# Altium PCB FPGA.PcbDoc (part 3 of 4)
Units mil, origin at the board's own origin, x right, y up, seen from the top; angles counter-clockwise.
Board outline 4000 x 2400 mil, 6 copper layers (Top Layer, InternalPlane1, MidLayer1, InternalPlane2, InternalPlane3, Bottom Layer), stack 58.8 mil thick; 235 components, 235 nets, 1406 pads, 621 vias.
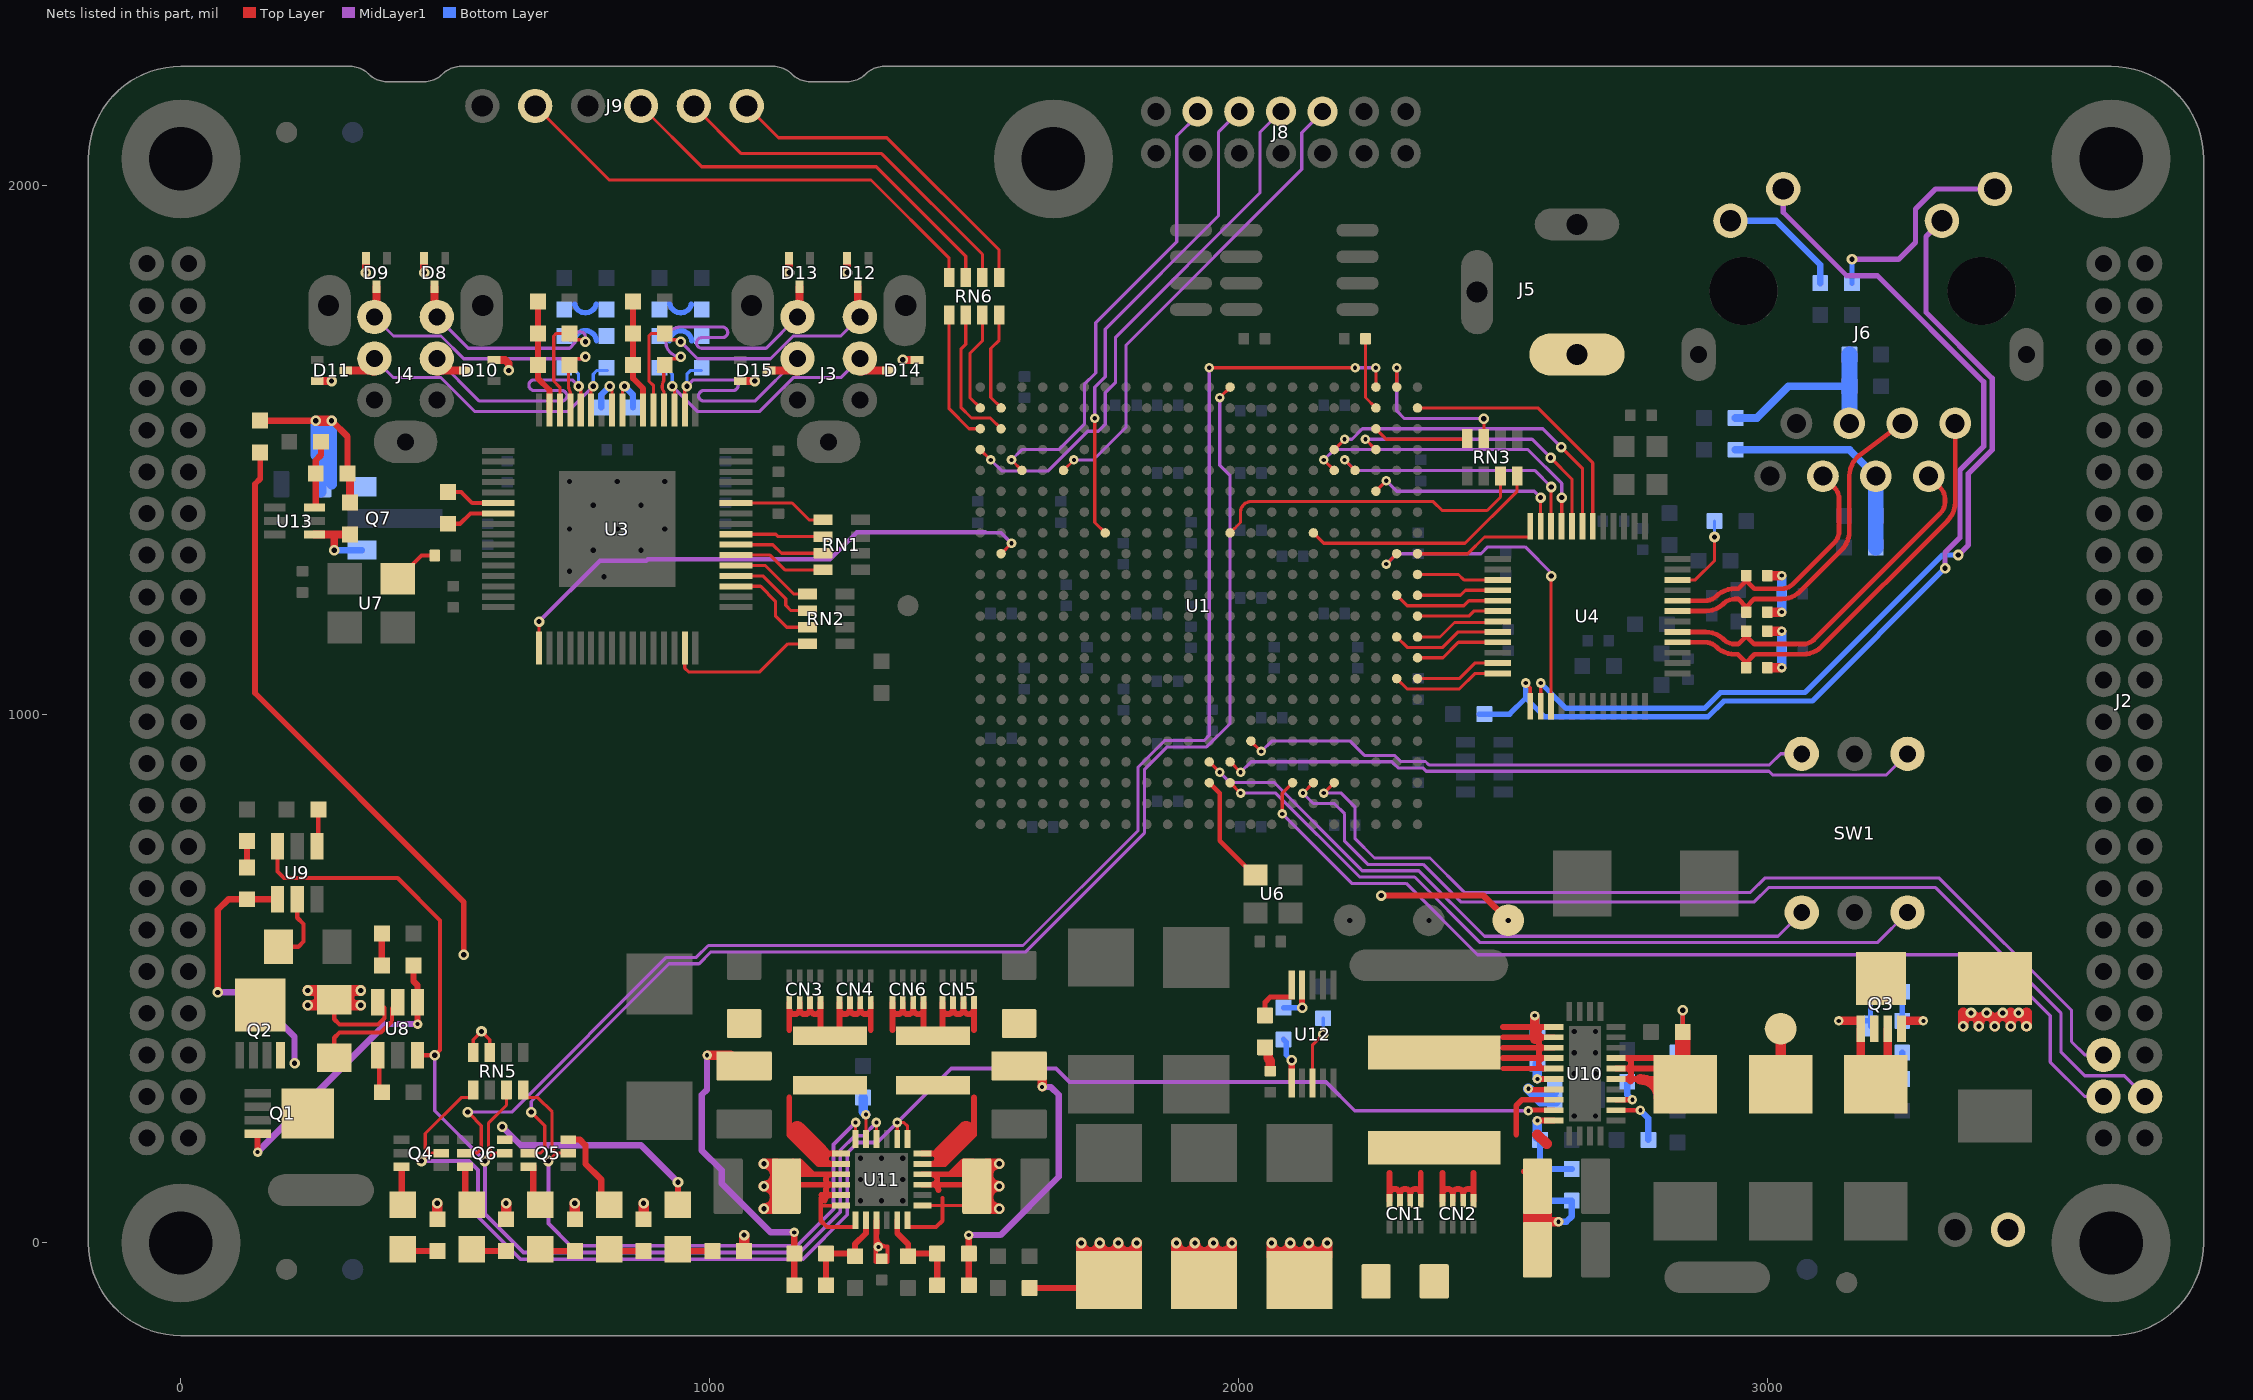
[diagram p7: the nets of this part, all layers, seen from the top]

## Via types
v1: diameter 20, hole 10, Top Layer to Bottom Layer, tented both sides, 322 vias
v2: diameter 18, hole 8, Top Layer to Bottom Layer, tented both sides, 299 vias

## Nets (pads, with @x,y where several pads share a name; then routed paths per layer and width w, separated by ;. In a path a pad name is that pad's centre, name@x,y a point inside that pad or via, vN(x,y) a via of type N, cw(c..) or ccw(c..) an arc to the next point about the centre after c; other vN are vias at no path point) (continued)
IO2-36: J2.40 U1.V3 | length 1799.5
  Top Layer w6: v2(2161.22,850.67) U1.V3@2180.91,870.35
  MidLayer1 w6: v2(2161.22,850.67) 2194.33,850.67 2220,825 2220,765 2257,728 2362,728 2427,663 2968,663 2995,690 3325,690 3575,440 3575,380.71 3600,355.71 J2.40@3635.63,355.71
IO2-37: J2.41 U1.U3 | length 1953.9
  Top Layer w6: v2(2121.85,850.67) U1.U3@2141.54,870.35
  MidLayer1 w6: v2(2121.85,850.67) 2141.54,830.98 2180.91,830.98 2200.59,811.3 2200.59,759.41 2244,716 2349,716 2420,645 2975,645 3002,672 3318,672 3555,435 3555,361.34 3600,316.34 3675,316.34 J2.41@3714.37,276.97
IO2-38: J2.42 U1.T3 | length 1893.3
  Top Layer w6: v2(2082.48,811.3) 2082.48,850.67 U1.T3@2102.17,870.35
  MidLayer1 w6: v2(2082.48,811.3) 2213.78,680 2316.87,680 2451.87,545 3420,545 3535,430 3535,341.97 3600,276.97 J2.42@3635.63,276.97
LREQ: U1.B14 U3.1 | length 1049.8
  Top Layer w6: U3.1@677.36,1125 v1(677.36,1175) ; U1.B14@1550.98,1303.43 v2(1570.67,1323.11)
  MidLayer1 w7: 1521,1344 1522.2,1342.8 1550.98,1342.8 v2(1570.67,1323.11)
  MidLayer1 w8: v1(677.36,1175) 792.36,1290 880,1290 883,1293 1227.25,1293 1278.25,1344 1521,1344
NetC1_1: C1.1 C31.1 CN5.5 CN5.6 CN5.7 CN5.8 CN6.5 CN6.6 CN6.7 CN6.8 L3.2 L6.1 R42.1 | length 993.7
  Top Layer w11: 1345.47,402.5 CN6.5@1345.47,455 ; CN6.5@1345.47,442.5 ccw(c1355.32,442.5) 1365.16,442.36 ; CN6.6@1365.16,455 1365.16,442.36 ; CN6.7@1384.84,455 CN6.7@1384.84,442.5 ; L3.2@1404.53,402.5 CN6.8@1404.53,442.5 ; CN6.8@1404.53,455 CN6.8@1404.53,442.5 ; L3.2@1440.47,402.5 CN5.5@1440.47,455 ; CN5.5@1440.47,442.5 ccw(c1450.32,442.5) 1460.16,442.36 ; CN5.6@1460.16,455 1460.16,442.36 ; CN5.7@1479.84,455 CN5.7@1479.84,442.5 ; 1499.53,402.5 CN5.8@1499.53,442.5 ; CN5.8@1499.53,455 CN5.8@1499.53,442.5 ; 1365.16,442.36 ccw(c1375,442.5) CN6.7@1384.84,442.5 ; CN6.7@1384.84,442.5 ccw(c1394.69,442.5) CN6.8@1404.53,442.5 ; 1460.16,442.36 ccw(c1470,442.5) CN5.7@1479.84,442.5 ; CN5.7@1479.84,442.5 ccw(c1489.69,442.5) CN5.8@1499.53,442.5
  Top Layer w12: C1.1@1490,-80 R42.1@1490,-20 v2(1490,15)
  Top Layer w18: v2(1628.5,295) C31.1@1628.5,340
  MidLayer1 w12: v2(1490,15) 1550,15 1660,125 1660,280 1645,295 v2(1628.5,295)
NetC1_2: C1.2 R38.1 R42.2 U11.5 | length 197.7
  Top Layer w11: U11.5@1354.53,43 1354.53,18.47 1375.5,-2.5 R38.1@1375.5,-15.5 ; R38.1@1365.5,-15.5 R38.1@1375,-25
  Top Layer w12: R38.1@1375,-25 1380,-20 R42.2@1430,-20 C1.2@1430,-80
NetC2_1: C2.1 C30.1 CN3.5 CN3.6 CN3.7 CN3.8 CN4.5 CN4.6 CN4.7 CN4.8 L2.2 L5.1 R43.1 | length 1028.4
  Top Layer w11: 1150.47,402.5 CN3.5@1150.47,455 ; CN3.5@1150.47,442.5 ccw(c1160.32,442.5) 1170.16,442.36 ; CN3.6@1170.16,455 1170.16,442.36 ; CN3.7@1189.84,455 CN3.7@1189.84,442.5 ; L2.2@1209.53,402.5 CN3.8@1209.53,442.5 ; CN3.8@1209.53,455 CN3.8@1209.53,442.5 ; L2.2@1245.47,402.5 CN4.5@1245.47,455 ; CN4.5@1245.47,442.5 ccw(c1255.32,442.5) 1265.16,442.36 ; CN4.6@1265.16,455 1265.16,442.36 ; CN4.7@1284.84,455 CN4.7@1284.84,442.5 ; 1304.53,402.5 CN4.8@1304.53,442.5 ; CN4.8@1304.53,455 CN4.8@1304.53,442.5 ; 1170.16,442.36 ccw(c1180,442.5) CN3.7@1189.84,442.5 ; CN3.7@1189.84,442.5 ccw(c1199.69,442.5) CN3.8@1209.53,442.5 ; 1265.16,442.36 ccw(c1275,442.5) CN4.7@1284.84,442.5 ; CN4.7@1284.84,442.5 ccw(c1294.69,442.5) CN4.8@1304.53,442.5
  Top Layer w12: C2.1@1160,-80 R43.1@1160,-20 v2(1160,20)
  Top Layer w18: v2(995,355) C30.1@1040,355
  MidLayer1 w12: v2(995,355) 995,290 985,280 985,175 1022.5,137.5 1022.5,112.5 1115,20 v2(1160,20)
NetC2_2: C2.2 R40.1 R43.2 U11.2 | length 184.3
  Top Layer w11: R40.1@1274.5,-15.5 1274.5,-2.5 1295.47,18.47 U11.2@1295.47,43
  Top Layer w12: C2.2@1220,-80 R43.2@1220,-20 1270,-20 R40.1@1275,-25
NetC3_1: C3.1 C26.1 C27.1 CN1.5 CN1.6 CN1.7 CN1.8 CN2.5 CN2.6 CN2.7 CN2.8 L1.2 L4.1 R41.1 U10.22 | length 915.1
  Top Layer w11: CN1.8@2285.47,80 2285.47,92.5 ; 2285.47,132.5 2285.47,92.5 ; CN1.7@2305.16,80 2305.16,92.5 ; CN1.6@2324.84,80 2324.84,92.64 ; CN1.5@2344.53,80 2344.53,132.5 ; 2344.53,92.5 ccw(c2334.68,92.5) 2324.84,92.64 ; CN2.8@2385.47,80 2385.47,92.5 ; 2385.47,132.5 2385.47,92.5 ; CN2.7@2405.16,80 2405.16,92.5 ; CN2.6@2424.84,80 2424.84,92.64 ; CN2.5@2444.53,80 2444.53,132.5 ; 2444.53,92.5 ccw(c2434.68,92.5) 2424.84,92.64 ; 2525,205 2525,260 2535.79,270.79 U10.22@2596,270.79 ; C27.1@2540,135 C27.1@2565,110 ; 2285.47,92.5 cw(c2295.31,92.5) 2305.16,92.5 ; 2305.16,92.5 cw(c2315,92.5) 2324.84,92.64 ; 2385.47,92.5 cw(c2395.31,92.5) 2405.16,92.5 ; 2405.16,92.5 cw(c2415,92.5) 2424.84,92.64
  Top Layer w18: 2565,40 v2(2605,40)
  Top Layer w20: 2565,205 2582.5,187.5
  Top Layer w55: C26.1@2565,-10 2565,40 C27.1@2565,107.5 C27.1@2565,110
  Bottom Layer w12: R41.1@2570,80 C3.1@2630,80 2630,50 2620,40 v2(2605,40)
NetC3_2: C3.2 R39.1 R41.2 U10.24 | length 184.3
  Top Layer w11: v2(2565.16,231.42) U10.24@2596,231.42
  Bottom Layer w11: R39.1@2565.16,199.84 R39.1@2570,195
  Bottom Layer w12: R39.1@2570,195 R41.2@2570,140 C3.2@2630,140
  Bottom Layer w18: R39.1@2565.16,199.84 v2(2565.16,231.42)
NetC4_1: C4.1 R5.2 R6.2 R9.1 | length 118.8
  Bottom Layer w10: 924.05,1705.46 cw(c945,1704) 965.95,1705.46 ; 924.62,1774.92 ccw(c945,1780) 965.38,1774.92
NetC5_1: C5.1 R7.2 R8.2 R10.1 | length 118.8
  Bottom Layer w10: 744.05,1705.46 cw(c765,1704) 785.95,1705.46 ; 744.62,1774.92 ccw(c765,1780) 785.38,1774.92
NetC6_1: C6.1 U12.3 | length 130.8
  Top Layer w6: U12.3@2140,302.5 2140,375 v1(2160,395)
  Bottom Layer w6: v1(2160,395) C6.1@2160,425
NetC7_1: C7.1 U10.2 | length 108.2
  Top Layer w9: U10.2@2714,251.1 v2(2759.84,251.1)
  Bottom Layer w12: v2(2759.84,251.1) 2775,235.94 C7.1@2775,195
NetC8_1: C8.1 R19.2 | length 60
  Top Layer w12: R19.2@380,525 C8.1@380,585
NetC9_1: C9.1 R20.2 | length 50
  Top Layer w12: R20.2@125,710 C9.1@125,760
NetC10_1: C10.1 U3.54 | length 103.6
  Top Layer w8: C10.1@505,1420 530,1420 550.79,1399.21 U3.54@600,1399.21
NetC10_2: C10.2 U3.55 | length 102.1
  Top Layer w8: C10.2@505,1360 528,1360 547.53,1379.53 U3.55@599,1379.53
NetC11_1: C11.1 C23.1 J6.5 L10.2 | length 369.9
  Bottom Layer w15: L10.2@2940,1560 2980,1560 3040,1620 C11.1@3155,1620
  Bottom Layer w30: J6.5@3155,1550 C11.1@3155,1620 C23.1@3155,1680
NetC12_1: C12.1 C20.1 J6.4 L9.2 | length 420.7
  Bottom Layer w15: L9.2@2940,1500 3155,1500 J6.4@3205,1450
  Bottom Layer w30: C20.1@3205,1315 C12.1@3205,1375 J6.4@3205,1450
NetC14_1: C14.1 R3.1 R4.1 U3.38 | length 213
  Top Layer w11.5: C14.1@855,1780 R3.1@855,1720 R4.1@855,1660 855,1635 874.21,1615.79 U3.38@874.21,1575
NetC15_1: C15.1 R1.1 R2.1 U3.47 | length 214.1
  Top Layer w11.5: C15.1@675,1780 R1.1@675,1720 R2.1@675,1660 675,1635 697.05,1612.95 U3.47@697.05,1575
NetC16_1: C16.1 U10.20 | length 60
  Top Layer w11: v2(2565.16,310.16) U10.20@2596,310.16
  Bottom Layer w18: C16.1@2565,339.21 2565.16,339.06 v2(2565.16,310.16)
NetC16_2: C16.2 L1.1 U10.15 U10.16 U10.17 U10.18 U10.19 | length 681.5
  Top Layer w9: 2577.46,329.84 U10.19@2596,329.84
  Top Layer w9.3: 2500,329.84 2577.46,329.84
  Top Layer w11: 2500,349.53 2577.5,349.53 ; 2500,369.21 2577.5,369.21 ; 2500,388.9 2560,388.9 2577.5,388.9 ; 2500,408.58 2560,408.58 2577.5,408.58 ; 2577.46,329.84 cw(c2577.5,339.68) 2577.5,349.53 ; U10.18@2596,349.53 2577.5,349.53 ; U10.17@2596,369.21 2577.5,369.21 ; U10.16@2596,388.9 2577.5,388.9 ; U10.15@2596,408.58 2577.5,408.58 ; 2577.5,349.53 cw(c2577.5,359.37) 2577.5,369.21 ; 2577.5,369.21 cw(c2577.5,379.06) 2577.5,388.9 ; 2577.5,388.9 cw(c2577.5,398.74) 2577.5,408.58
  Top Layer w18: 2560,385 2560,388.9 2560,408.58 v2(2560,430)
  Bottom Layer w18: v2(2560,430) 2560,404.21 C16.2@2565,399.21
NetC17_1: C17.1 U8.1 | length 71
  Top Layer w8: U8.1@372.5,355 375,352.5 C17.1@375,285
NetC18_1: C18.1 U9.1 | length 71
  Top Layer w8: U9.1@257.5,750 260,752.5 C18.1@260,820
NetC24_1: C24.1 U10.21 | length 193.6
  Top Layer w7: v2@2550.16,288.47 U10.21@2596,288.47 ; v2@2550.16,291.47 U10.21@2596,291.47
  Bottom Layer w20: v2(2548.16,291.47) 2571.63,268 C24.1@2600,268 ; 2555.63,285 C24.1@2596,285
NetC161_1: C161.1 R50.1 R51.2 | length 123
  Top Layer w18: R51.2@3000,1088 v2(3027,1088) ; R50.1@3000,1157 v2(3027,1157)
  Bottom Layer w18: v2(3027,1088) C161.1@3027,1122.5 v2(3027,1157)
NetC162_1: C162.1 R48.1 R49.2 | length 123
  Top Layer w18: R49.2@3000,1193 v2(3027,1193) ; R48.1@3000,1262 v2(3027,1262)
  Bottom Layer w18: v2(3027,1193) C162.1@3027,1227.5 v2(3027,1262)
NetD2_2: D2.2 R11.1 R12.2 | length 110
  Bottom Layer w12: D2.2@3195,310 R11.1@3255,310 R12.2@3255,360
NetD3_1: D3.1 Q4.6 | length 77
  Top Layer w12: Q4.6@417.5,144.41 417.5,74.5 D3.1@420,72 D3.1@422.5,74.5
NetD3_2: D3.2 R14.1 | length 66.2
  Top Layer w12: D3.2@420,-12 423,-15 R14.1@485,-15
NetD4_1: D4.1 Q6.6 | length 69.9
  Top Layer w12: D4.1@537.5,74.5 Q6.6@537.5,144.41
NetD4_2: D4.2 R15.1 | length 66.2
  Top Layer w12: D4.2@550,-12 553,-15 R15.1@615,-15
NetD5_1: D5.1 Q5.3 | length 168.5
  Top Layer w12: Q5.3@732.5,195.59 754.41,195.59 765,185 765,150 795,120 795,87 D5.1@810,72
NetD5_2: D5.2 R16.1 | length 66.2
  Top Layer w12: D5.2@810,-12 813,-15 R16.1@875,-15
NetD6_1: D6.1 Q6.3 | length 419
  Top Layer w12: D6.1@940,72 v1(940,115)
  MidLayer1 w12: v1(607.5,220) 642.5,185 870,185 v1(940,115)
NetD6_2: D6.2 R17.1 | length 66.2
  Top Layer w12: D6.2@940,-12 943,-15 R17.1@1005,-15
NetD7_1: D7.1 Q5.6 | length 84.1
  Top Layer w12: D7.1@666.5,75 Q5.6@666.5,144.91 ; D7.1@680,72 D7.1@690,82
NetD7_2: D7.2 R18.1 | length 66.2
  Top Layer w12: D7.2@680,-12 683,-15 R18.1@745,-15
NetJ6_1: J6.1 R51.1 U4.16 | length 830.4
  Top Layer w9: U4.16@2830,1135.79 2882.57,1135.79 cw(c2882.57,1105.79) 2903.77,1127.01 ; 2903.21,1127.54 ccw(c2938.1,1162.47) 2938.1,1113.1 2944.37,1113.1 R51.1@2960,1097.47 ; R51.1@2960,1088 R51.1@2960,1097.47 ; J6.1@3355,1550 3355,1400.74 cw(c3305.63,1400.74) 3340.58,1365.87 3102.25,1127.54 cw(c3067.36,1162.47) 3067.36,1113.1 2975.63,1113.1 R51.1@2960,1097.47
NetJ6_2: J6.2 R50.2 U4.17 | length 700.8
  Top Layer w9: U4.17@2830,1155.47 2882.89,1155.47 cw(c2882.57,1105.79) 2915.3,1143.18 2917.23,1141.25 ccw(c2938.43,1162.47) 2938.43,1132.47 2944.94,1132.47 2960,1147.53 2975.06,1132.47 3067.36,1132.47 ccw(c3067.36,1162.47) 3088.56,1141.25 3326.85,1379.54 ccw(c3305.63,1400.74) 3335.63,1400.74 3335.63,1406.94 ccw(c3305.63,1406.94) 3326.85,1428.15 J6.2@3305,1450
NetJ6_3: J6.3 R49.1 U4.19 | length 666.1
  Top Layer w9: U4.19@2830,1194.84 2882.89,1194.84 ; 2882.57,1194.84 ccw(c2882.57,1244.53) 2882.89,1194.84 ; 2917.69,1209.37 cw(c2882.57,1244.53) 2915.3,1207.14 ; J6.3@3247.72,1550 J6.3@3255,1550 3174.91,1489.93 ccw(c3205,1450) 3155,1450 3155,1345.74 cw(c3105.63,1345.74) 3140.58,1310.87 3061.99,1232.28 cw(c3027.1,1267.21) 3027.1,1217.84 2975.37,1217.84 2960,1202.47 2944.63,1217.84 2938.43,1217.84 ccw(c2938.43,1187.84) 2917.23,1209.07 2915.3,1207.14 ; 2882.89,1194.84 ccw(c2882.57,1244.53) 2915.3,1207.14
NetJ6_6: J6.6 R48.2 U4.20 | length 490.5
  Top Layer w9: U4.20@2830,1214.53 2882.57,1214.53 ccw(c2882.57,1244.53) 2903.77,1223.3 ; 2903.21,1222.77 cw(c2938.1,1187.84) 2938.1,1237.21 2944.69,1237.21 2960,1252.53 2975.32,1237.21 3027.1,1237.21 ccw(c3027.1,1267.21) 3048.3,1245.99 3126.85,1324.54 ccw(c3105.63,1345.74) 3135.63,1345.74 3135.63,1406.94 ccw(c3105.63,1406.94) 3126.85,1428.15 J6.6@3105,1450
NetJ6_9: J6.9 R22.2 | length 407
  MidLayer1 w10: v1(3160,1860) 3248,1860 3280,1892 3280,1955 3318,1993 J6.9@3430,1993
  Bottom Layer w10: R22.2@3160,1815 v1(3160,1860)
NetJ6_10: J6.10 U4.2 | length 1696.2
  Top Layer w6: U4.2@2571.42,1015 v2(2571.42,1058.9)
  MidLayer1 w10: J6.10@3330,1933 3300,1903 3300,1760 3425,1635 3425,1499.8 3380,1454.8 3380,1320 v1(3361,1301)
  Bottom Layer w10: v2(2571.42,1058.9) 2619.32,1011 2881,1011 2911,1041 3071,1041 3331,1301 v1(3361,1301)
NetJ6_11: J6.11 R45.2 U4.1 | length 2039.1
  Top Layer w6: v2(2543,1058.9) 2551.73,1050.17 U4.1@2551.73,1015
  MidLayer1 w10: J6.11@3030,1993 3030,1949 3149.98,1829.02 3208.36,1829.02 3409,1628.37 3409,1506.43 3364,1461.43 3364,1333.7 3336,1305.7 v1(3336,1276)
  Bottom Layer w10: R45.2@2455,1000 R45.2@2465,1000 2512.55,1000 2543,1030.45 ; v2(2543,1058.9) 2543,1030.45 ; v1(3336,1276) 3085,1025 2917.63,1025 2887.63,995 2578.45,995 2543,1030.45
NetJ6_12: J6.12 R21.2 | length 239.4
  Bottom Layer w12: J6.12@2930,1933 3017,1933 3100,1850 R21.2@3100,1815
NetJ9_2: J9.2 RN6.4 | length 938.7
  Top Layer w6: J9.2@670,2150 810,2010 1305,2010 1452.76,1862.24 RN6.4@1452.76,1825.5
NetJ9_4: J9.4 RN6.3 | length 790.4
  Top Layer w6: J9.4@859.37,2165 J9.4@872.19,2152.19 ; J9.4@870,2150 985,2035 1315,2035 1484.25,1865.75 RN6.3@1484.25,1825.5
NetJ9_5: J9.5 RN6.2 | length 705.8
  Top Layer w6: J9.5@970,2150 1060,2060 1325,2060 1515.75,1869.25 RN6.2@1515.75,1825.5
NetJ9_6: J9.6 RN6.1 | length 642.3
  Top Layer w6: J9.6@1070,2150 1130,2090 1335,2090 1547.24,1877.76 RN6.1@1547.24,1825.5
NetL2_1: L2.1 U11.19 U11.20 | length 329.3
  Top Layer w11: 1150.5,275 1150.5,204.53 1205.5,149.53 ; 1205.5,175 1205.5,174.53 1205.5,149.53 ; U11.20@1248,149.53 1229.5,149.53 ; U11.19@1248,169.21 1229.5,169.21 ccw(c1229.5,159.37) 1229.5,149.53 ; 1205.5,149.53 1229.5,149.53
  Top Layer w32: 1165.5,214.53 1205.5,174.53 1210.5,169.53
NetL3_1: L3.1 U11.11 U11.12 | length 303.8
  Top Layer w11: U11.11@1402,149.53 1420.5,149.53 ; U11.12@1402,169.21 1420.5,169.21 cw(c1420.5,159.37) 1420.5,149.53 ; 1499.5,275 1499.5,204.53 1444.5,149.53 1420.5,149.53
  Top Layer w32: 1439.5,169.53 1484.5,214.53
NetQ1_4: Q1.4 R19.1 U8.4 | length 556.5
  Top Layer w12: v2(145,171.99) Q1.4@145,206.61 ; R19.1@440,525 440,495 447.5,487.5 U8.4@447.5,455 v2(447.5,414) v2@447.5,411.47
  MidLayer1 w12: v2(145,171.99) 387.01,414 v2(447.5,414) v2@447.5,411.47
NetQ1_5: Q1.5 R53.2 U8.5 | length 183.3
  Top Layer w8: R53.2@290,353 290,388 300,398 378,398 399,419 399,444 U8.5@400,445
NetQ2_4: Q2.4 R20.1 U9.4 | length 511.7
  Top Layer w12: v1(70,473.82) 70,630 90,650 R20.1@125,650 U9.4@182.5,650 U9.4@187.5,650
  MidLayer1 w12: v1(70,473.82) 131.18,473.82 215,390 v1(215,340)
NetQ2_5: Q2.5 R52.2 U9.5 | length 136.1
  Top Layer w8: R52.2@185,560 222,560 232,570 232,603 220,615 U9.5@220,650
NetQ3_4: Q3.4 R12.1 R35.2 | length 136.6
  Top Layer w16: Q3.4@3253.39,420 v2(3295,420)
  Bottom Layer w10: R12.1@3255,420 R35.2@3255,475
  Bottom Layer w12: R12.1@3255,420 v2(3295,420)
NetQ5_5: Q5.5 U1.N22 | length 2474.1
  Top Layer w6: Q5.5@657.5,170 680,170 688,178 688,222 v1(662.5,247.5) ; v2(1964.37,1598.7) U1.N22@1984.06,1618.39
  MidLayer1 w6: v1(662.5,247.5) 662.5,267.5 923,528 979.9,528 1002.4,550.5 1597.47,550.5 1822,775.03 1822,895.03 1864.97,938 1939.66,938 1984.06,982.4 1984.06,1450.94 1964.37,1470.63 v2(1964.37,1598.7)
NetQ6_5: Q6.5 U1.Y22 | length 2922.8
  Top Layer w6: Q6.5@537.5,170 560,170 568,178 568,222 v1@545.99,244.01 ; v2(1944.69,1655) v2(2220.28,1655) ; U1.Y22@2259.65,1618.39 v2@2259.65,1654.65
  MidLayer1 w6: v1(542.5,247.5) 625.53,247.5 918.03,540 974.93,540 997.43,562.5 1592.5,562.5 1810,780 1810,900 1860,950 1934.68,950 1944.68,960 v2(1944.69,1655) ; v2(2220.28,1655) v2(2259.65,1655)
NetQ7_1: Q7.1 R23.2 U13.1 | length 138.8
  Top Layer w15: U13.1@252.5,1339.41 290,1339.41 ; v1(290,1310) 290,1339.41 ; R23.2@309.41,1339.41 290,1339.41
  Bottom Layer w12: v1(290,1310) Q7.1@342.5,1310
NetR13_1: R13.1 U3.40 | length 89.5
  Top Layer w6: U3.40@834.84,1578.9 834.84,1616 v1(838.84,1620)
  Bottom Layer w12: v1(838.84,1620) 855,1603.84 R13.1@855,1580
NetR13_2: R13.2 U3.41 | length 93.3
  Top Layer w6: v1(811.16,1620) 815.16,1616 U3.41@815.16,1575
  Bottom Layer w12: R13.2@795,1580 795,1603.84 v1(811.16,1620)
NetR25_1: R25.1 R26.2 U13.3 | length 126.1
  Top Layer w12: U13.3@255,1393.09 R26.2@255,1455 255,1480 265,1490 R25.1@265,1515
NetR27_1: R27.1 U10.3 | length 70.3
  Top Layer w11: U10.3@2714,270.79 v2(2744.84,270.79)
  Bottom Layer w11: v2(2744.84,270.79) v2@2745.66,271.6
  Bottom Layer w12: R27.1@2735,305 2735,280.63 v2(2744.84,270.79)
NetR29_1: R29.1 U4.22 | length 160
  Top Layer w6: U4.22@2830,1253.9 2863.9,1253.9 2900,1290 v1(2900,1335)
  Bottom Layer w6: v1(2900,1335) R29.1@2900,1365
NetR32_1: R32.1 U11.17 | length 80.3
  Top Layer w6: U11.17@1295.47,197 v2(1295.47,242.84)
  Bottom Layer w18: R32.1@1290,275 1290,248.32 v2(1295.47,242.84)
NetR36_1: R36.1 U12.9 | length 78.3
  Top Layer w11.5: v1(2120.31,444.69) U12.9@2120.31,487.5
  Bottom Layer w10: R36.1@2085,445 2120,445 v1(2120.31,444.69)
NetR37_1: R37.1 U12.10 | length 79.1
  Top Layer w10: R37.1@2050,430 2050,455 2060,465 U12.10@2100,465
NetR46_1: R46.1 U7.3 | length 81.6
  Top Layer w8: U7.3@405,1256 U7.3@410,1261 ; U7.3@420,1265 455,1300 R46.1@480,1300
NetR47_2: R47.2 U1.Y21 | length 139.2
  Top Layer w6: R47.2@2240,1710 R47.2@2240,1710 2239.96,1598.7 U1.Y21@2259.65,1579.02
NetRN1_5: RN1.5 U3.27 | length 177.7
  Top Layer w6: U3.27@1050,1399.21 1155.79,1399.21 1187.76,1367.24 RN1.5@1214.5,1367.24
NetRN1_6: RN1.6 U3.24 | length 166.3
  Top Layer w6: U3.24@1050,1340.16 1124.84,1340.16 1129.25,1335.75 RN1.6@1214.5,1335.75
NetRN1_7: RN1.7 U3.23 | length 171.2
  Top Layer w6: U3.23@1050,1320.47 1119.53,1320.47 1135.75,1304.25 RN1.7@1214.5,1304.25
NetRN2_7: RN2.7 U3.19 | length 183
  Top Layer w6: U3.19@1050,1241.73 1096.27,1241.73 1124.21,1213.79 1124.21,1185.79 1145.75,1164.25 RN2.7@1184.5,1164.25
NetRN2_8: RN2.8 U3.15 | length 294.3
  Top Layer w6: U3.15@952.95,1125 952.95,1087.05 960,1080 1095,1080 1147.76,1132.76 RN2.8@1184.5,1132.76
NetRN3_3: RN3.3 U1.N15 | length 638.7
  Top Layer w6: U1.N15@1984.06,1342.8 2003.74,1362.48 2003.74,1382.17 ; RN3.3@2495.34,1450.26 2495.34,1410.34 2470,1385 2385,1385 2368.15,1401.85 2023.43,1401.85 ; 2003.74,1382.17 cw(c2023.43,1382.17) 2023.43,1401.85 ; 2003.74,1382.17 cw(c2023.43,1382.17) 2023.43,1401.85
NetRN3_4: RN3.4 U1.U15 | length 462.8
  Top Layer w6: U1.U15@2141.54,1342.8 2161.22,1323.11 2428.11,1323.11 2526.83,1421.83 RN3.4@2526.83,1450.26
NetRN3_7: RN3.7 U1.AA22 | length 326.2
  Top Layer w6: U1.AA22@2299.02,1618.39 v2@2299.02,1654.65 ; RN3.7@2463.84,1521.26 v1(2463.84,1558.76)
  MidLayer1 w6: v2(2299.02,1655) 2299.02,1573.48 2313.74,1558.76 v1(2463.84,1558.76)
NetRN3_8: RN3.8 U1.Y20 | length 181.4
  Top Layer w6: U1.Y20@2259.65,1539.65 2279.33,1519.96 2431.04,1519.96 RN3.8@2432.35,1521.26
NetU1_M3: U1.M3 U6.3 | length 212.3
  Top Layer w9: U1.M3@1944.68,870.35 1964.37,850.67 1964.37,760.63 2029,696 U6.3@2032,696
PC0: RN2.6 U3.20 | length 169
  Top Layer w6: U3.20@1050,1261.42 1100.58,1261.42 1143.9,1218.1 1143.9,1205.59 1153.74,1195.75 RN2.6@1184.5,1195.75
PC1: RN2.5 U3.21 | length 156.8
  Top Layer w6: U3.21@1050,1281.1 1105.12,1281.1 1158.98,1227.24 RN2.5@1184.5,1227.24
PC2: RN1.8 U3.22 | length 176.1
  Top Layer w6: U3.22@1050,1300.79 1114.21,1300.79 1142.24,1272.76 RN1.8@1214.5,1272.76
PGOOD1: Q5.2 RN5.4 U11.18 | length 1120.4
  Top Layer w6: RN5.4@647.24,289.5 647.24,275 675,275 702,248 702,178 710,170 ; v1(695,155) 710,170 ; Q5.2@732.5,170 710,170 ; U11.18@1275.79,197 v2(1275.79,227.84)
  MidLayer1 w7: v1(695,155) 695,37 737,-5 1165,-5 1234,64 1234,186.06 v2(1275.79,227.84)
PGOOD3: Q6.2 RN5.3 U8.3 U9.3 U11.16 | length 2181.6
  Top Layer w6: v1(575,155) 590,170 ; RN5.3@612,285.75 RN5.3@615.75,289.5 615.75,260.75 582,227 582,178 590,170 ; Q6.2@612.5,170 590,170 ; U11.16@1315.16,197 v2(1315.16,227.84)
  Top Layer w8: U9.3@182.5,750 182.5,702.5 195,690 410,690 490,610 490,365 v1(480,355) U8.3@447.5,355
  MidLayer1 w7: v1(480,355) 480,250 v1(575,155) 575,55 648,-18 1170.38,-18 1247,58.62 1247,175.38 1274.62,203 1290.32,203 v2(1315.16,227.84)
PGOOD5: Q4.2 RN5.1 U10.23 U11.13 U11.14 | length 2844.9
  Top Layer w6: v1(455,155) 470,170 ; Q4.2@492.5,170 470,170 ; RN5.1@552.76,275 530,275 462,207 462,178 470,170 ; U11.14@1354.53,197 v2(1354.53,227.84) 1367.16,227.84 1374.21,220.79 U11.13@1374.21,197
  Top Layer w7: v2@2550.16,250.1 U10.23@2596,250.1 ; v2@2550.16,253.1 U10.23@2596,253.1
  MidLayer1 w7: v1(455,155) 545,155 562,138 562,49.62 642.62,-31 1175.77,-31 1260,53.23 1260,170 1280,190 1316.69,190 v2(1354.53,227.84) 1456.69,330 1655,330 1680.5,304.5 2165.5,304.5 2219.9,250.1 v2(2548.16,250.1)
PME: U1.AA14 U4.3 | length 625.5
  Top Layer w6: v2(2279.33,1283.74) U1.AA14@2299.02,1303.43 ; U4.3@2591.1,1015 v1(2591.1,1261.1)
  MidLayer1 w6: v2(2279.33,1283.74) 2299.02,1303.43 2458.43,1303.43 2471.27,1316.27 2541.77,1316.27 2591.1,1266.93 v1(2591.1,1261.1)
PWR: D1.1 J5.1 J7.1 Q3.5 | length 273.5
  Top Layer w20: v1(3370,410) v1@3370,415 ; 3370,435 v1@3370,415 ; v1(3400,410) v1@3400,415 ; v1(3430,410) v1@3430,415 ; v1(3460,410) v1@3460,415 ; 3460,435 3460,430 v1@3460,415 ; v1(3490,410) v1@3490,415 ; 3490,435 3490,430 v1@3490,415 ; v1@3370,415 cw(c3385,415) v1@3400,415 ; v1@3400,415 cw(c3415,415) v1@3430,415 ; v1@3430,415 cw(c3445,415) v1@3460,415 ; v1@3460,415 cw(c3475,415) v1@3490,415
  other v1: 3385,435 3415,435 3445,435 3475,435
SD0: U1.AA8 U4.48 | length 211.2
  Top Layer w6: U1.AA8@2299.02,1067.2 2318.7,1047.52 2417.52,1047.52 2446.73,1076.73 U4.48@2490,1076.73
SD1: U1.AB8 U4.47 | length 163.7
  Top Layer w6: U1.AB8@2338.39,1067.2 2417.2,1067.2 2446.42,1096.42 U4.47@2490,1096.42
SD2: U1.AB9 U4.45 | length 163.7
  Top Layer w6: U1.AB9@2338.39,1106.57 2386.57,1106.57 2415.79,1135.79 U4.45@2490,1135.79
SD3: U1.AA10 U4.44 | length 211.2
  Top Layer w6: U1.AA10@2299.02,1145.94 2318.7,1126.26 2386.26,1126.26 2415.47,1155.47 U4.44@2490,1155.47
SD4: U1.AB10 U4.43 | length 164.8
  Top Layer w6: U1.AB10@2338.39,1145.94 2380.94,1145.94 2408.32,1173.32 2490,1173.32 U4.43@2490,1175.16
SD5: U1.AB11 U4.42 | length 155.6
  Top Layer w6: U1.AB11@2338.39,1185.32 2435.32,1185.32 2444.84,1194.84 U4.42@2490,1194.84
SD6: U1.AA12 U4.41 | length 203.1
  Top Layer w6: U1.AA12@2299.02,1224.69 2318.7,1205 2425.94,1205 2435.47,1214.53 U4.41@2490,1214.53
SD7: U1.AB12 U4.40 | length 155.6
  Top Layer w6: U1.AB12@2338.39,1224.69 2419.69,1224.69 2429.21,1234.21 U4.40@2490,1234.21
SD8: U1.AB13 U4.39 | length 155.8
  Top Layer w6: U1.AB13@2338.39,1264.06 2415.94,1264.06 2426.1,1253.9 U4.39@2490,1253.9
SD9: U1.AB14 U4.36 | length 246.4
  Top Layer w6: U1.AB14@2338.39,1303.43 2433.43,1303.43 2465,1335 2551.73,1335 U4.36@2551.73,1355
SD10: U1.Y17 U4.35 | length 387.4
  Top Layer w6: U1.Y17@2259.65,1421.54 v2(2279.33,1441.22) ; v1(2571.1,1409.53) 2571.1,1355.32 U4.35@2571.42,1355
  MidLayer1 w6: v2(2279.33,1441.22) 2299.02,1421.54 2559.09,1421.54 v1(2571.1,1409.53)
SD11: U1.W18 U4.34 | length 514
  Top Layer w6: v2(2200.59,1480.59) U1.W18@2220.28,1460.91 ; U4.34@2591.1,1355 v1(2591.1,1429.53)
  MidLayer1 w6: v2(2200.59,1480.59) 2220.28,1460.91 2559.72,1460.91 v1(2591.1,1429.53)
SD12: U1.V18 U4.33 | length 595
  Top Layer w6: v2(2161.22,1480.59) U1.V18@2180.91,1460.91 ; U4.33@2610,1355.79 U4.33@2610.79,1355 2611.1,1355.32 v1(2611.1,1409.53)
  MidLayer1 w6: v2(2161.22,1480.59) 2180.91,1500.28 2547.22,1500.28 2611.1,1436.4 v1(2611.1,1409.53)
SD13: U1.Y19 U4.32 | length 539.8
  Top Layer w6: v2(2239.96,1519.96) U1.Y19@2259.65,1500.28 ; v1(2590,1485) 2630.47,1444.53 U4.32@2630.47,1355 U4.32@2630,1355.47
  MidLayer1 w6: v2(2239.96,1519.96) 2555.04,1519.96 v1(2590,1485)
SD14: U1.V19 U4.31 | length 626.4
  Top Layer w6: U1.V19@2180.91,1500.28 v2(2200.59,1519.96) ; v1(2610,1505) 2650.16,1464.84 U4.31@2650.16,1355
  MidLayer1 w6: v2(2200.59,1519.96) 2214.5,1519.96 2234.19,1539.65 2575.35,1539.65 v1(2610,1505)
SD15: U1.AB21 U4.30 | length 494.9
  Top Layer w6: U1.AB21@2338.39,1579.02 2565.98,1579.02 2669.84,1475.16 U4.30@2669.84,1355 U4.30@2670,1355.16
SEL1: SW1.1 U1.M4 | length 1275.5
  Top Layer w6: U1.M4@1944.68,909.72 v2(1964.37,890.04)
  MidLayer1 w6: v2(1964.37,890.04) 1983.37,871.04 2066.97,871.04 2234.01,704 2341,704 2465,580 3020,580 SW1.1@3065,625
SEL2: SW1.4 U1.N4 | length 1324.3
  Top Layer w6: U1.N4@1984.06,909.72 v2(2003.74,890.04)
  MidLayer1 w6: v2(2003.74,890.04) 2023.7,910 2290,910 2301.59,898.41 2348.56,898.41 2354.97,892 3003,892 3010,885 3225,885 SW1.4@3265,925
SEL4: SW1.3 U1.N3 | length 1429.8
  Top Layer w6: U1.N3@1984.06,870.35 v2(2003.74,850.67)
  MidLayer1 w6: v2(2003.74,850.67) 2070.37,850.67 2229.04,692 2333,692 2457,568 3208,568 SW1.3@3265,625
SEL8: SW1.6 U1.P5 | length 1085.3
  Top Layer w6: U1.P5@2023.43,949.09 v2(2043.11,929.41)
  MidLayer1 w6: v2(2043.11,929.41) 2062.8,949.09 2210.91,949.09 2238,922 2294.97,922 2306.56,910.41 2353.53,910.41 2359.94,904 3004,904 3025,925 SW1.6@3065,925
SOFT-TCK/RXD: RN6.6 U1.B20 | length 271
  Top Layer w6: RN6.6@1484.25,1754.5 1484.25,1699.25 1475,1690 1475,1580 1495,1560 1530.63,1560 U1.B20@1550.98,1539.65
SOFT-TDI/CTS: RN6.8 U1.B21 | length 190.2
  Top Layer w6: RN6.8@1547.24,1754.5 1547.24,1707.24 1531.3,1691.3 1531.3,1598.7 U1.B21@1550.98,1579.02
SOFT-TDO/TXD: RN6.7 U1.A21 | length 193.5
  Top Layer w6: U1.A21@1511.61,1579.02 1491.93,1598.7 1491.93,1681.93 1515.75,1705.75 RN6.7@1515.75,1754.5
SOFT-TMS/RTS: RN6.5 U1.A20 | length 251.7
  Top Layer w6: RN6.5@1452.76,1754.5 1452.76,1577.24 1490.35,1539.65 U1.A20@1511.61,1539.65
TCK: J8.6 U1.G15 | length 917.9
  Top Layer w6: v2(1728.15,1559.33) 1728.15,1362.48 U1.G15@1747.83,1342.8
  MidLayer1 w6: v2(1728.15,1559.33) 1728.15,1618.15 1747.83,1637.83 1747.83,1727.83 1961.89,1941.89 1961.89,2100 J8.6@2001.26,2139.37
TDI: J8.10 U1.E18 | length 902.8
  Top Layer w6: U1.E18@1669.09,1460.91 v2(1688.78,1480.59)
  MidLayer1 w6: v2(1688.78,1480.59) 1725.59,1480.59 1787.2,1542.2 1787.2,1697.83 2119.37,2030 2119.37,2099.37 2158.74,2138.74 J8.10@2158.74,2139.37
TDO: J8.8 U1.A19 | length 1018.8
  Top Layer w6: U1.A19@1511.61,1500.28 v2(1531.3,1480.59)
  MidLayer1 w6: v2(1531.3,1480.59) 1551.89,1460 1640,1460 1715,1535 1735,1535 1747.83,1547.83 1747.83,1607.83 1767.52,1627.52 1767.52,1712.52 2040.63,1985.63 2040.63,2100.63 2079.37,2139.37 J8.8@2080,2139.37
TMS: J8.4 U1.C18 | length 873.3
  Top Layer w6: v2(1570.67,1480.59) U1.C18@1590.35,1460.91
  MidLayer1 w6: v2(1570.67,1480.59) 1590.35,1500.28 1660.28,1500.28 1708.46,1548.46 1708.46,1623.46 1730,1645 1730,1740 1883.15,1893.15 1883.15,2093.15 1922.52,2132.52 J8.4@1922.52,2139.37
TPA0N: D13.3 J3.5 R4.2 U3.36 | length 649.8
  Top Layer w6: R4.2@913,1658.1 R4.2@913,1658 ; U3.36@913.58,1575 913.58,1609.28 cw(c929.27,1620) 913,1629.82 R4.2@913,1658 ; R4.2@915,1660 R4.2@913,1658 ; R4.2@915,1672 v1@945,1672
  Top Layer w15: J3.5@1165.94,1751.22 1170,1755.28 D13.3@1170,1808
  MidLayer1 w6: v1(945,1676) cw(c945,1704) 945,1732 1024,1732 cw(c1024,1722) 1024,1712 985,1712 ccw(c985,1702) 985,1692 1106.72,1692 J3.5@1165.94,1751.22
TPA0P: D12.3 J3.6 R3.2 U3.37 | length 649.3
  Top Layer w6: U3.37@893.9,1575 893.9,1621.1 885,1630 885,1715 890,1720 R3.2@915,1720 ; R3.2@915,1708 v1@945,1708
  Top Layer w15: D12.3@1280,1808 1280,1755.28 J3.6@1284.05,1751.22
  MidLayer1 w6: v1(945,1704) 977,1672 1115,1672 1158,1715 1247.83,1715 J3.6@1284.05,1751.22
TPA1N: D9.3 J4.5 R2.2 U3.45 | length 605.8
  Top Layer w6: R2.2@733.1,1658.1 733.1,1620 ccw(c752.1,1620) 736.42,1609.28 U3.45@736.42,1575 ; R2.2@735,1672 v1@765,1672
  Top Layer w15: J4.5@365.94,1751.22 370,1755.28 D9.3@370,1808
  MidLayer1 w6: J4.5@365.94,1751.22 402.17,1715 492,1715 535,1672 761,1672 v1(765,1676)
TPA1P: D8.3 J4.6 R1.2 U3.46 | length 606.4
  Top Layer w6: U3.46@716.73,1575 716.73,1618.27 705,1630 705,1715 710,1720 R1.2@735,1720 ; R1.2@735,1708 v1@765,1708
  Top Layer w15: D8.3@480,1808 480,1755.28 J4.6@484.05,1751.22
  MidLayer1 w6: J4.6@484.05,1751.22 543.28,1692 735,1692 745,1702 745,1713 cw(c755,1713) 765,1713 v1(765,1704)
TPB0N: D15.3 J3.3 R5.1 U3.34 | length 609.1
  Top Layer w6: U3.34@952.95,1578.9 952.95,1616 v1(956.95,1620)
  Top Layer w10: J3.3@1150.11,1650 ccw(c1165.94,1672.48) J3.3@1165.94,1644.98
  Top Layer w15: D15.3@1112,1650 1150.11,1650 1165.94,1650 J3.3@1165.94,1672.48
  MidLayer1 w6: v1(956.95,1620) 968.95,1632 1044,1632 cw(c1044,1622) 1044,1612 989,1612 ccw(c989,1602) 989,1592 1085.46,1592 J3.3@1165.94,1672.48
  Bottom Layer w6: v1(956.95,1620) 956.95,1642.9 964.05,1650 R5.1@984.05,1650
TPB0P: D14.3 J3.4 R6.1 U3.35 | length 609.2
  Top Layer w6: v1(929.27,1620) 933.27,1616 U3.35@933.27,1575
  Top Layer w10: J3.4@1284.06,1644.98 ccw(c1284.06,1672.48) J3.4@1299.89,1650
  Top Layer w15: J3.4@1284.05,1672.48 1284.06,1650 1299.89,1650 D14.3@1338,1650
  MidLayer1 w6: v1(929.27,1620) 977.27,1572 1093.74,1572 1158,1636.26 1247.83,1636.26 J3.4@1284.05,1672.48
  Bottom Layer w6: R6.1@902.17,1650 922.17,1650 929.27,1642.9 v1(929.27,1620)
TPB1N: D11.3 J4.3 R7.1 U3.43 | length 664.4
  Top Layer w6: U3.43@775.79,1578.9 775.79,1616 v1(779.79,1620)
  Top Layer w10: J4.3@350.11,1650 ccw(c365.94,1672.48) J4.3@365.94,1644.98
  Top Layer w15: D11.3@312,1650 350.11,1650 365.94,1650 J4.3@365.94,1672.48
  MidLayer1 w6: J4.3@365.94,1672.48 402.17,1636.26 492,1636.26 556.26,1572 731.79,1572 v1(779.79,1620)
  Bottom Layer w6: v1(779.79,1620) 779.79,1642.9 786.89,1650 R7.1@806.89,1650
TPB1P: D10.3 J4.4 R8.1 U3.44 | length 666.1
  Top Layer w6: v1(752.1,1620) 756.1,1616 U3.44@756.1,1575
  Top Layer w10: J4.4@484.06,1644.98 ccw(c484.06,1672.48) J4.4@499.89,1650
  Top Layer w15: J4.4@484.05,1672.48 484.06,1650 499.89,1650 D10.3@538,1650
  MidLayer1 w6: J4.4@484.05,1672.48 564.54,1592 720,1592 ccw(c720,1602) 720,1612 668,1612 cw(c668,1622) 668,1632 740.1,1632 v1(752.1,1620)
  Bottom Layer w6: R8.1@725,1650 745,1650 752.1,1642.9 v1(752.1,1620)
V-FAULT: C25.1 D8.2 D9.2 D10.2 D11.2 D12.2 D13.2 D14.2 D15.2 Q7.2 R23.1 R24.2 R26.1 | length 893.5
  Top Layer w8: R26.1@315,1455 R26.1@320,1450
  Top Layer w12: R24.2@150,1555 v1(255,1555) ; v1(285,1555) 315,1525 R26.1@315,1455
  Top Layer w15: D11.2@258,1630 v1(285,1630) ; R23.1@320,1400 R26.1@320,1450 ; v1(350,1835) D9.2@350,1862 ; v1(460,1835) D8.2@460,1862 ; D10.2@592,1670 612.78,1670 620,1662.78 v1(620,1650) ; D15.2@1058,1630 v1(1085,1630) ; v1(1150,1835) D13.2@1150,1862 ; v1(1260,1835) D12.2@1260,1862 ; v1(1365,1670) D14.2@1392,1670
  Top Layer w20: v1(255,1555) v1(285,1555)
  Bottom Layer w20: v1(255,1555) v1@255,1550 ; C25.1@265,1420 265,1480 ; 265,1530 265,1480 ; 285,1435 v1(285,1555) ; v1@285,1550 cw(c270,1550) v1@255,1550 ; v1@255,1550 255,1490 265,1480
V-IN: C13.1 C39.1 C40.1 C41.1 D2.1 pad.0@3025,405 Q3.1 Q3.2 Q3.3 R35.1 R44.1 U10.5 U10.6 U10.7 | length 1105.6
  Top Layer w8: C13.1@2840,399 v1(2840,440)
  Top Layer w11: U10.5@2714,310.16 2732.5,310.16 ; U10.6@2714,329.84 2732.5,329.84 ; U10.7@2714,349.53 2732.5,349.53 ; 2741.15,305.01 ccw(c2732.5,300.31) 2732.5,310.16 ; C39.1@2810,310.16 2732.5,310.16 ; C39.1@2810,329.84 2732.5,329.84 ; C39.1@2810,349.53 2732.5,349.53 ; 2732.5,310.16 ccw(c2732.5,320) 2732.5,329.84 ; 2732.5,329.84 ccw(c2732.5,339.68) 2732.5,349.53
  Top Layer w16: C40.1@3025,300 C40.1@3040,285 ; v2(3135,420) Q3.1@3176.61,420
  Top Layer w16.5: C41.1@3176.61,313.39 Q3.1@3176.61,405 ; C41.1@3227.8,313.39 Q3.3@3227.8,405
  Top Layer w20: 2760,309.5 cw(c2760,274.5) C39.1@2795,274.5 ; C40.1@3025,300 pad.0@3025,405
  Top Layer w30: C39.1@2840,305 C13.1@2840,399
  Bottom Layer w8: R44.1@2830,360 2830,395 2840,405 v1(2840,440)
  Bottom Layer w10: v2(3135,420) D2.1@3190,420 ; D2.1@3195,410 R35.1@3195,475
VCC: C28.1 C29.1 C36.1 C37.1 C38.1 C101.1 C102.1 L4.2 pad.0@2510,610 R14.2 R15.2 R16.2 R17.2 R18.2 R24.1 R31.1 R36.2 R37.2 R53.1 RN5.7 RN5.8 U8.6 U11.1 U11.3 U11.6 U11.7 U11.9 U11.10 U11.21 U11.22 U11.23 U11.24 U12.1 | length 5268
  Top Layer w6: U11.7@1402,70.79 1440,70.79 C29.1@1478,70.79
  Top Layer w6.5: 1210,70.79 U11.24@1248,70.79
  Top Layer w7: RN5.8@552.76,360.5 552.76,384.25 v1(568.5,400) 584.25,384.25 RN5.7@584.25,360.5
  Top Layer w8: R53.1@290,460 290,423 300,413 373,413 385,425 385,445 ; 1210,85 1210,70.79 1210,42 1222,30 U11.1@1275.79,30 ; v2@1313.66,-2.84 U11.3@1313.66,43 ; C101.1@1314,-36 1314,5 ; v2@1316.66,-2.84 1316.66,6.65 ; U11.3@1316.66,43 1316.66,17.66 ccw(c1334.84,12.16) 1316.66,6.65 ; 1336,-36 1336,-6.81 cw(c1334.84,12.16) 1316.66,6.65 ; U11.6@1374.21,30 1428,30 1440,42 1440,70.79 1440,85
  Top Layer w11: R24.1@150,1495 150,1445 140,1435 140,1040 535,645 v1(535,545) ; C28.1@1155,129.84 1229.5,129.84 ; C28.1@1158,154.5 1182.5,130 ; C28.1@1165,110.16 1229.46,110.16 ; C28.1@1170.5,154.5 1195,130 ; 1211,90.47 1227.46,90.47 ; 1217.66,80.63 cw(c1227.5,80.63) 1227.46,90.47 ; 1229.5,110.16 U11.22@1248,110.16 ; U11.23@1248,90.47 1229.5,90.47 ; U11.21@1248,129.84 1229.5,129.84 ; U11.9@1402,110.16 1420.5,110.16 ; U11.10@1402,129.84 1420.5,129.84 ; 1432.34,100.31 ccw(c1422.5,100.31) 1422.54,110.16 ; 1455,130 1479.5,154.5 C29.1@1492,154.5 ; 1467.5,130 C29.1@1492,154.5 ; C29.1@1485,110.16 1422.54,110.16 ; C29.1@1495,129.84 1420.5,129.84 ; C29.1@1499,154.5 C29.1@1492,154.5 ; R31.1@1605,-85 C36.1@1725,-85 ; C36.1@1750,-75 C36.1@1755,-70 ; 1227.46,90.47 1229.5,90.47 ; 1229.46,110.16 cw(c1229.5,120) 1229.5,129.84 ; 1229.46,110.16 ccw(c1229.5,100.31) 1229.5,90.47 ; 1420.5,129.84 cw(c1420.5,120) 1420.54,110.16 1422.54,110.16
  Top Layer w11.5: U12.1@2100.63,302.5 v1(2100.63,345.31)
  Top Layer w12: v1(2270,657) 2463,657 pad.0@2510,610
  Top Layer w18: R37.2@2050,370 2056,364 2056,349 2060,345 C102.1@2060,325
  Top Layer w20: v1(240,449.5) v1@248,449.5 ; v1(240,477.5) v1@248,477.5 ; R53.1@285,449.5 v1@248,449.5 ; R53.1@285,477.5 v1@248,477.5 ; R53.1@295,449.5 v1@332,449.5 ; R53.1@295,477.5 v1@332,477.5 ; v1(340,449.5) v1@332,449.5 ; v1(340,477.5) v1@332,477.5 ; R14.2@485,45 v1(485,75) ; R15.2@615,45 v1(615,75) ; R18.2@745,45 v1(745,75) ; R16.2@875,45 v1(875,75) ; R17.2@1065,-15 v1(1065,15) ; C28.1@1126.5,65 v1(1102.5,65) ccw(c1102.5,86.25) v1(1102.5,107.5) ccw(c1102.5,128.75) v1(1102.5,150) C28.1@1126.5,150 ; C29.1@1523.5,65 v1(1547.5,65) cw(c1547.5,86.25) v1(1547.5,107.5) cw(c1547.5,128.75) v1(1547.5,150) C29.1@1523.5,150 ; C36.1@1702.5,-25 v1(1702.5,0) ; C36.1@1737.5,-25 v1(1737.5,0) ; C36.1@1772.5,-25 v1@1772.5,-0.06 ; v1(1772.5,0) v1@1772.5,-0.06 ; C36.1@1807.5,-25 v1(1807.5,0) ; C37.1@1882.5,-25 v1(1882.5,0) ; C37.1@1917.5,-25 v1(1917.5,0) ; C37.1@1952.5,-25 v1(1952.5,0) ; C37.1@1987.5,-25 v1(1987.5,0) ; C38.1@2062.5,-25 v1(2062.5,0) ; C38.1@2097.5,-25 v1(2097.5,0) ; C38.1@2132.5,-25 v1(2132.5,0) ; C38.1@2167.5,-25 v1(2167.5,0) ; v1@248,449.5 ccw(c248,463.5) v1@248,477.5 ; v1@248,449.5 ccw(c248,463.5) v1@248,477.5 ; v1@332,449.5 cw(c332,463.5) v1@332,477.5 ; v1@332,449.5 cw(c332,463.5) v1@332,477.5 ; v1(1702.5,0) ccw(c1720,0) v1(1737.5,0) ; v1(1702.5,0) ccw(c1720,0) v1(1737.5,0) ; v1(1737.5,0) ccw(c1755,0) v1@1772.5,-0.06 ; v1(1737.5,0) ccw(c1755,0) v1@1772.5,-0.06 ; v1@1772.5,-0.06 ccw(c1790,0) v1(1807.5,0) ; v1@1772.5,-0.06 ccw(c1790,0) v1(1807.5,0) ; v1(1882.5,0) ccw(c1900,0) v1(1917.5,0) ; v1(1882.5,0) ccw(c1900,0) v1(1917.5,0) ; v1(1917.5,0) ccw(c1935,0) v1(1952.5,0) ; v1(1917.5,0) ccw(c1935,0) v1(1952.5,0) ; v1(1952.5,0) ccw(c1970,0) v1(1987.5,0) ; v1(1952.5,0) ccw(c1970,0) v1(1987.5,0) ; v1(2062.5,0) ccw(c2080,0) v1(2097.5,0) ; v1(2062.5,0) ccw(c2080,0) v1(2097.5,0) ; v1(2097.5,0) ccw(c2115,0) v1(2132.5,0) ; v1(2097.5,0) ccw(c2115,0) v1(2132.5,0) ; v1(2132.5,0) ccw(c2150,0) v1(2167.5,0) ; v1(2132.5,0) ccw(c2150,0) v1(2167.5,0)
  Top Layer w50: C38.1@2115,-70 C38.1@2125,-60
  Bottom Layer w10: R36.2@2085,385 2090,380 2090,355.94 v1(2100.63,345.31)
  other v2: 1319,-7.5